# Altium PCB template.PcbDoc
Units mil, origin at the board's own origin, x right, y up, seen from the top; angles counter-clockwise.
Board outline 2450 x 2235 mil, 2 copper layers (Top Layer, Bottom Layer); 20 components, 38 nets, 182 pads, 24 vias.
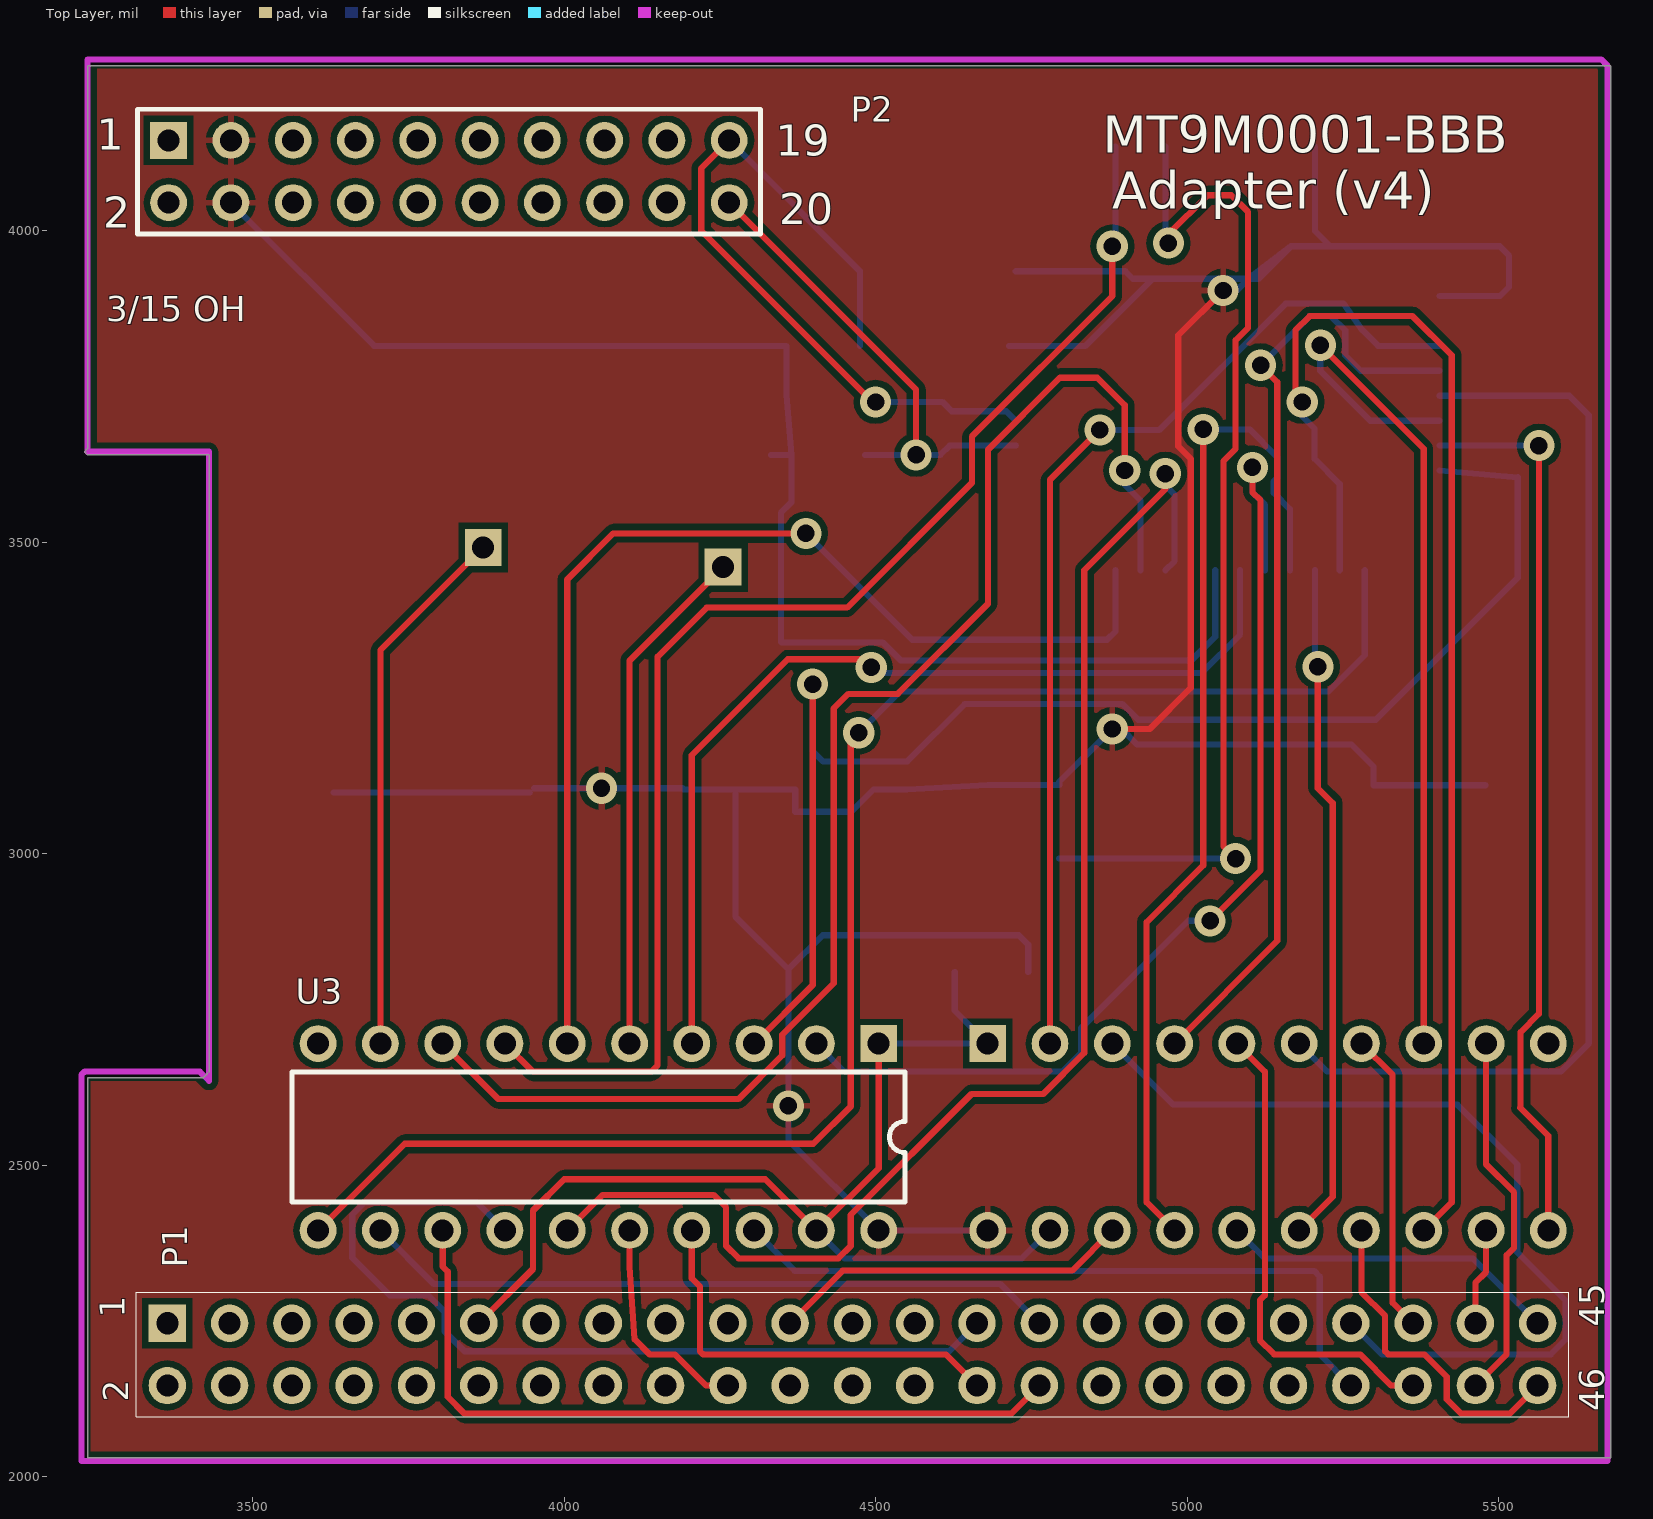
[diagram p0: Top Layer view]
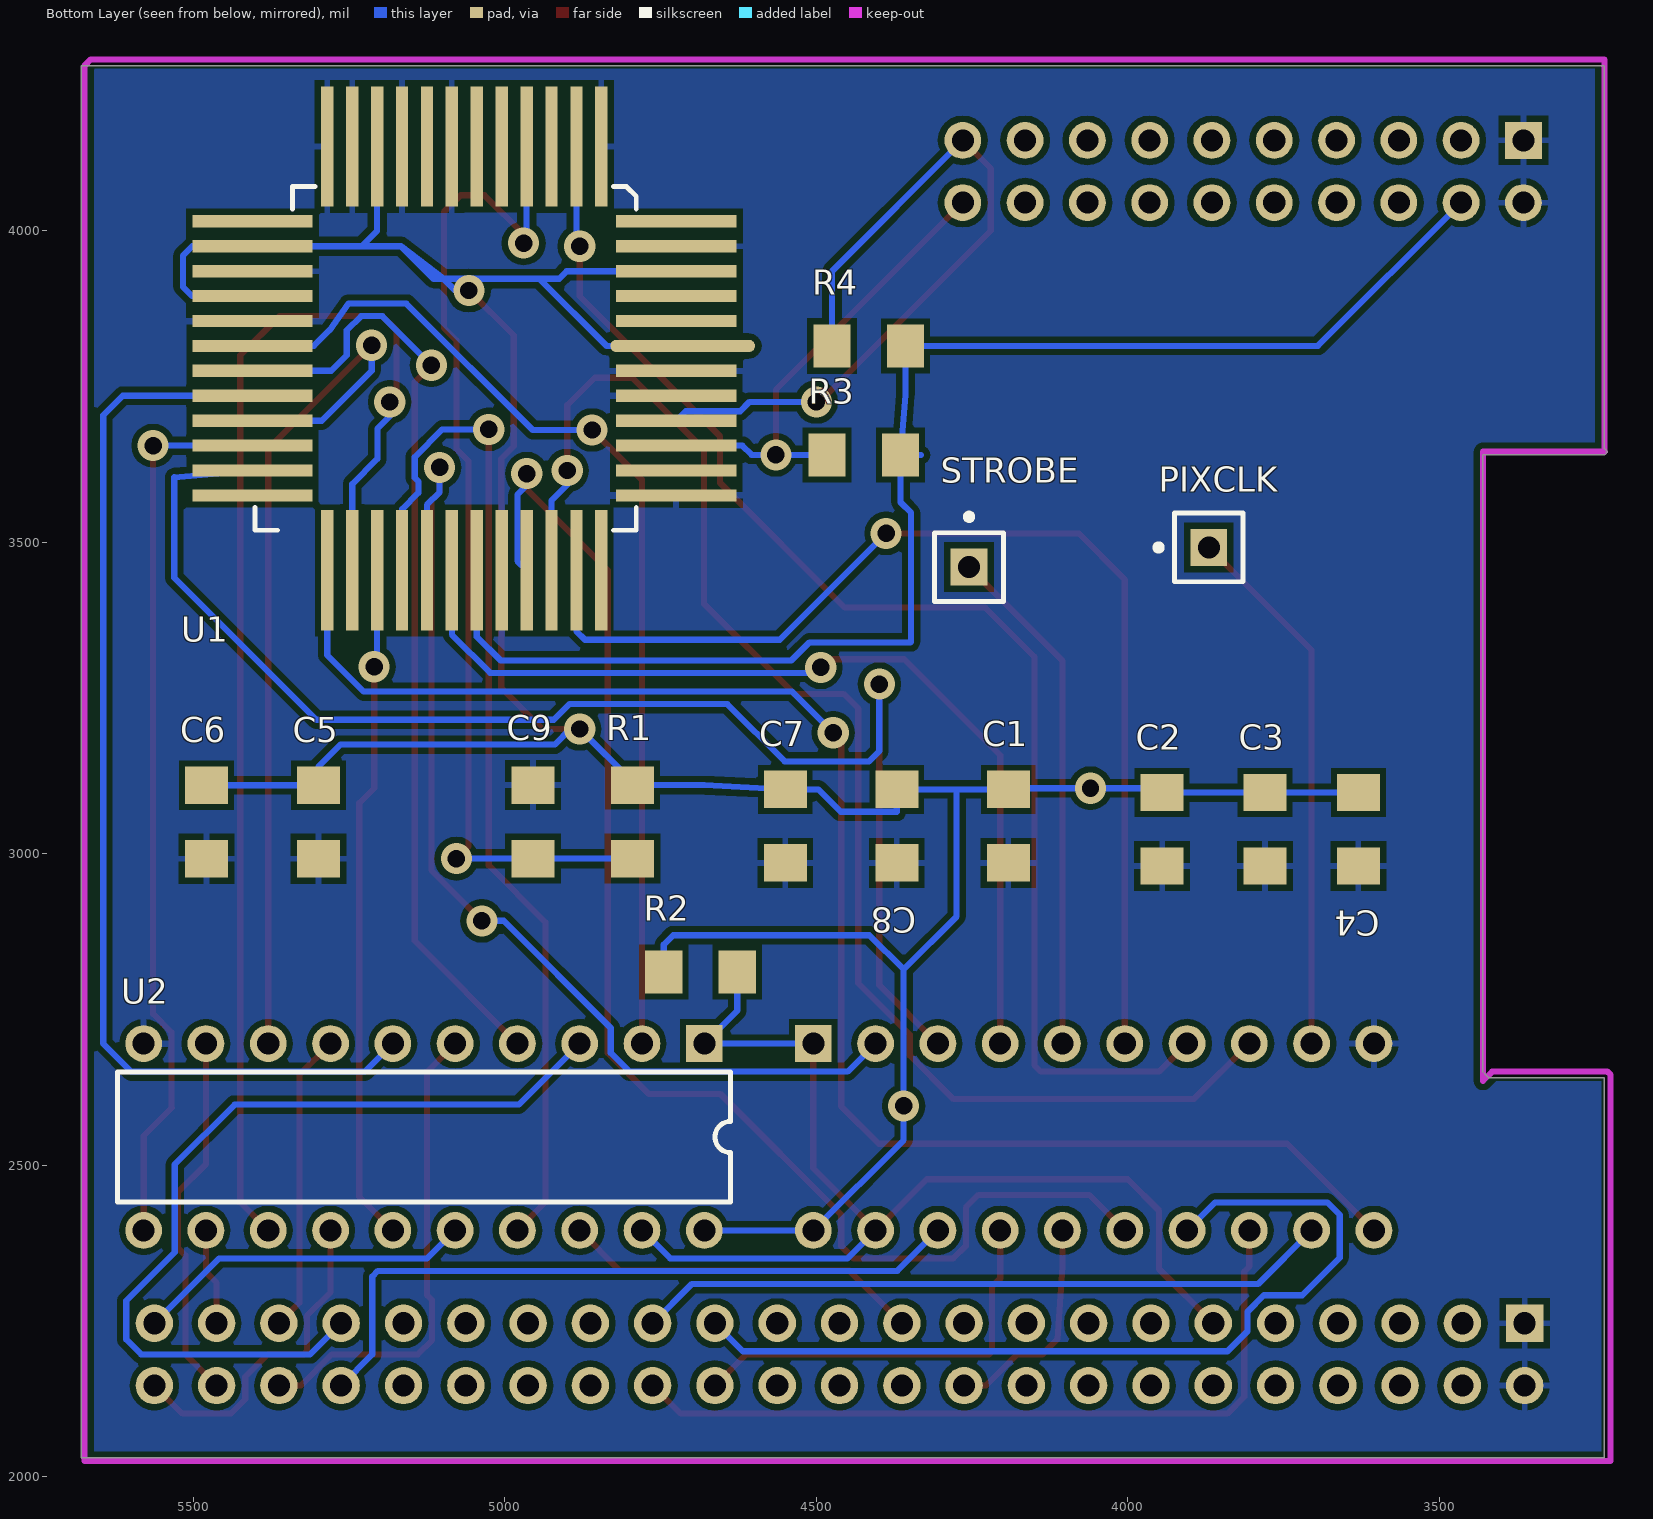
[diagram p1: Bottom Layer view, seen from below]

## Layer stack, top to bottom
Top Solder: solder mask 0.4, Solder Resist, Dk 3.5
Top Layer: signal copper 1.4
Dielectric 1: dielectric 12.6, FR-4, Dk 4.8
Bottom Layer: signal copper 1.4
Bottom Solder: solder mask 0.4, Solder Resist, Dk 3.5

## Board outline
5680,4265 5680,2030 3235,2030 3235,2640 3420,2640 3425,2645 3430,2650 3430,3640 3235,3640 3230,3645 3235,3650 3235,4265 5680,4265

## Design rules (kind name [scope] priority, off if disabled: settings)
Clearance [All] p1: gap=10
MinimumSolderMaskSliver [All] p1: minsoldermaskwidth=5
PolygonConnect [All] p1: connectstyle=Relief reliefconductorwidth=10 reliefentries=4 polygonreliefangle="90 Angle" airgapwidth=10
RoutingVias [All] p1: holewidth=28 width=50 viastyle="Through Hole" minholewidth=28 minwidth=50 maxholewidth=28 maxwidth=50
SolderMaskExpansion [All] p1: expansion=4
UnpouredPolygon [All] p1: allowunpoured=FALSE
Width [All] p1: maxlimit=10 minlimit=10 preferedwidth=10
28 further rules are at their usual default settings.

## Components (designator, comment, footprint, x,y, rotation, side; value= is the part's Value field where it differs from the comment)
C1 "1nF" 1206 4232,2985 r270 bottom
C2 "10nF" 1206 3985,2980 r270 bottom
C3 "100nF" 1206 3820,2980 r270 bottom
C4 "1uF" 1206 3670,2980 r270 bottom
C5 "100nF" 1206 5339.19,2991.81 r270 bottom
C6 "1uF" 1206 5519.19,2991.81 r270 bottom
C7 "100nF" 1206 4590,2985 r270 bottom
C8 "1uF" 1206 4411,2985 r270 bottom
C9 "1uF" 1206 4915,3110 r90 bottom
P1 "FEMALE HEADER 2x23" HEADER23X2 4462.9,2196 r0 top
P2 "Header 10X2" HDR2X10 3365,4145 r0 top
PIXCLK "Socket" PIN1 3870,3491.5 r90 bottom
R1 "10K" 1206 4755,3110 r90 bottom
R2 "10k" 1206 4745,2850 r0 bottom
R3 "10k" 1206 4365,3600 r180 bottom
R4 "10k" 1206 4475,3855 r0 bottom
STROBE "Socket" PIN1 4255,3460 r180 bottom
U1 "MT9M001" MT9M001_SOCKET 5065,3795 r270 bottom
U2 "74LVC244A" J020 5130,2545 r0 bottom
U3 "74LVC244A" J020 4055,2545 r180 top

## Footprints (in the part's own frame and the unit in brackets; to place one, negate y for a bottom-side part, rotate by r counter-clockwise, add the part's x,y. Pads: shape width x height; smd on the part's side, far side on the other; paste and mask are expansions set on the pad)
1206 [mil]
  rect 60x69 smd: 1(-118,40) 2(0,40)
HDR2X10 [mm] "Connector; Header; 10x2 Position"
  rect 1.5x1.5 hole 0.9: 1(0,0)
  round 1.5 hole 0.9: 2(0,-2.54) 3(2.54,0) 4(2.54,-2.54) 5(5.08,0) 6(5.08,-2.54) 7(7.62,0) 8(7.62,-2.54) 9(10.16,0) 10(10.16,-2.54) 11(12.7,0) 12(12.7,-2.54) 13(15.24,0) 14(15.24,-2.54) 15(17.78,0) 16(17.78,-2.54) 17(20.32,0) 18(20.32,-2.54) 19(22.86,0) 20(22.86,-2.54)
  silkscreen extent -1.27,-3.81 24.13,1.27
HEADER23X2 [mil] "HEADER23X2"
  rect 60x60 hole 35.43 mask+2: 1(-1100,50)
  round 60 hole 35.43 mask+2: 2(-1100,-50) 3(-1000,50) 4(-1000,-50) 5(-900,50) 6(-900,-50) 7(-800,50) 8(-800,-50) 9(-700,50) 10(-700,-50) 11(-600,50) 12(-600,-50) 13(-500,50) 14(-500,-50) 15(-400,50) 16(-400,-50) 17(-300,50) 18(-300,-50) 19(-200,50) 20(-200,-50) 21(-100,50) 22(-100,-50) 23(0,50) 24(0,-50) 25(100,50) 26(100,-50) 27(200,50) 28(200,-50) 29(300,50) 30(300,-50) 31(400,50) 32(400,-50) 33(500,50) 34(500,-50) 35(600,50) 36(600,-50) 37(700,50) 38(700,-50) 39(800,50) 40(800,-50) 41(900,50) 42(900,-50) 43(1000,50) 44(1000,-50) 45(1100,50) 46(1100,-50)
  silkscreen extent -1150,-100 1150,100
J020 [mm] "DIP; 20 Leads; Row Spacing 7.62 mm; Pitch 2.54 mm"
  rect 1.5x1.5 hole 0.9: 1(-11.43,-3.81)
  round 1.5 hole 0.9: 2(-8.89,-3.81) 3(-6.35,-3.81) 4(-3.81,-3.81) 5(-1.27,-3.81) 6(1.27,-3.81) 7(3.81,-3.81) 8(6.35,-3.81) 9(8.89,-3.81) 10(11.43,-3.81) 11(11.43,3.81) 12(8.89,3.81) 13(6.35,3.81) 14(3.81,3.81) 15(1.27,3.81) 16(-1.27,3.81) 17(-3.81,3.81) 18(-6.35,3.81) 19(-8.89,3.81) 20(-11.43,3.81)
  silkscreen extent -12.5,-2.65 12.5,2.65
MT9M001_SOCKET [mm]
  oval 0.5x5.9 smd: 1(-0.508,8.898)
  rect 0.5x4.9 smd: 2(-1.524,8.636) 3(-2.54,8.636) 4(-3.556,8.636) 5(-4.572,8.636) 6(-5.588,8.636) 19(-5.588,-8.648) 20(-4.572,-8.648) 21(-3.556,-8.648) 22(-2.54,-8.648) 23(-1.524,-8.648) 24(-0.508,-8.648) 25(0.508,-8.648) 26(1.524,-8.648) 27(2.54,-8.648) 28(3.556,-8.648) 29(4.572,-8.648) 30(5.588,-8.648) 43(5.588,8.636) 44(4.572,8.636) 45(3.556,8.636) 46(2.54,8.636) 47(1.524,8.636) 48(0.508,8.636)
  rect 4.9x0.5 smd: 7(-8.642,5.582) 8(-8.642,4.566) 9(-8.642,3.55) 10(-8.642,2.534) 11(-8.642,1.518) 12(-8.642,0.502) 13(-8.642,-0.514) 14(-8.642,-1.53) 15(-8.642,-2.546) 16(-8.642,-3.562) 17(-8.642,-4.578) 18(-8.642,-5.594) 31(8.642,-5.594) 32(8.642,-4.578) 33(8.642,-3.562) 34(8.642,-2.546) 35(8.642,-1.53) 36(8.642,-0.514) 37(8.642,0.502) 38(8.642,1.518) 39(8.642,2.534) 40(8.642,3.55) 41(8.642,4.566) 42(8.642,5.582)
  silkscreen extent -7.01,-8.54 7.01,7
PIN1 [mm] "Connector; Plug"
  rect 1.5x1.5 hole 0.9: 1(0,0)
  silkscreen extent -1.4,-1.4 1.4,2.18

## Part data
C1 C2 C3 C4 C5 C6 C7 C8 C9: library part cap, "capacitor"
P1: library part HDR_46_F_2_0.1_0.1, "CONN HEADER FMAL 46PS.1\" DL GOLD"
P2: "Header, 10-Pin, Dual row"
R1 R2 R3 R4: library part Res, "resistor"

## Via types
v1: diameter 50, hole 28, Top Layer to Bottom Layer, 24 vias

## Nets (pads, with @x,y where several pads share a name; then routed paths per layer and width w, separated by ;. In a path a pad name is that pad's centre, name@x,y a point inside that pad or via, vN(x,y) a via of type N, cw(c..) or ccw(c..) an arc to the next point about the centre after c; other vN are vias at no path point)
3.3V: C1.1 C2.1 C3.1 C4.1 C5.1 C6.1 C7.1 C8.1 P2.3 P2.4 R1.2 R2.2 R3.2 R4.1 U1.1 U1.4 U1.16 U1.20 U1.22 U1.37 U2.20 U3.20 | length 8159.4
  Top Layer w10: v1(4880,3200) 4940,3200 5006,3266 5006,3634 4986,3654 4986,3832 v1(5058,3904)
  Bottom Layer w10: P2.4 3695,3815 R4.1 4357,3736 R3.2 ; C4.1 C3.1 C2.1 ; C2.1@3952,3105 v1(4060,3105) C1.1@4190,3105 ; C1.1 4275,3103 ; 4332,3640 R3.2 ; U2.20 U3.20 4360,2540 v1(4360,2595) 4360,2814 ; U1.1 4837,3815 4945,3923 ; U1.4 4901,3935 4913,3923 4945,3923 ; R2.2 4745,2854 4730,2869 4415,2869 4360,2814 ; U1.37 5045.24,3348.24 5007,3310 4540.14,3310 4511.12,3339.02 4348.98,3339.02 4348,3340 4348,3547 4365,3564 R3.2 ; v1(5058,3904) 5080,3904 5099,3923 ; U1.16 5205.24,4000 5230.24,3975 ; U1.22 5502,3895 5517,3910 5517,3960 5502,3975 U1.20 5230.24,3975 ; C6.1 C5.1 5299.19,3140 5264.19,3175 4920,3175 4895,3200 v1(4880,3200) 4795,3115 R1.2 4680,3110 C7.1 4497,3103 4461,3067 4371,3067 C8.1 4275,3103 ; 4275,3103 4275,2899 4360,2814 ; 4945,3923 5099,3923 ; 5099,3923 5166.93,3975 ; 5099,3923 5114.93,3923 5166.93,3975 ; 5166.93,3975 5230.24,3975
D0: P1.21 U2.18 | length 578.8
  Top Layer w10: P1.21 4447.37,2330.47 4815.47,2330.47 U2.18
D1: P1.45 U2.16 | length 544.6
  Bottom Layer w10: U2.16 5125,2350 5458.9,2350 P1.45
D2: P1.46 U2.14 | length 535.8
  Top Layer w10: U2.14 5280,2296 5317.9,2258.1 5317.9,2201 5322.9,2196 5381,2196 5417,2160 5417,2124 5440,2101 5517.9,2101 P1.46
D3: P1.43 U2.12 | length 156.1
  Top Layer w10: P1.43 5462.9,2311 5480,2328.1 U2.12
D4: P1.44 U2.9 | length 593.4
  Top Layer w10: P1.44 5513,2196.1 5513,2355 5525,2367 5525,2456 5480,2501 U2.9
D5: P1.41 U2.7 | length 483.3
  Top Layer w10: U2.7 5330,2645 5330,2278.9 P1.41
D6: P1.42 U2.5 | length 774.1
  Top Layer w10: U2.5 5125,2650 5125,2291 5117,2283 5117,2219 5140,2196 5277.9,2196 5327.9,2146 P1.42
D7: P1.39 U2.3 | length 1419.4
  Bottom Layer w10: U2.3 4978,2597 5434,2597 5530,2501 5530,2360 5608,2282 5608,2220 5584,2196 5312.9,2196 P1.39
D8: P1.40 U3.18 | length 1134.3
  Bottom Layer w10: U3.18 4370,2330 5204,2330 5213,2321 5213,2195.9 P1.40
D9: P1.20 U3.16 | length 355.8
  Top Layer w10: U3.16 4105,2337 4113,2220 4137,2196 4177.9,2196 4227.9,2146 P1.20
EXPOSURE: P1.30 U3.13 | length 1250
  Top Layer w10: U3.13 3805,2337 3813,2329 3813,2128 3840,2101 4717.9,2101 P1.30
FRAME_VALID: P1.27 U3.14 | length 1443.1
  Bottom Layer w10: U3.14 3860,2440 3680,2440 3660,2420 3660,2351 3720,2291 3781.54,2291 3807.9,2264.64 3807.9,2233.1 3840,2201 4617.9,2201 P1.27
GND: C1.2 C2.2 C3.2 C4.2 C5.2 C6.2 C7.2 C8.2 C9.2 P1.1 P1.2 P2.1 P2.2 U1.5 U1.7 U1.13 U1.15 U1.17 U1.18 U1.21 U1.23 U1.38 U1.43 U1.47 U1.48 U2.10 U3.10
LINE_VALID: P1.29 U3.12 | length 1119.6
  Bottom Layer w10: U3.12 3791,2309 4699.9,2309 P1.29
NetC9_1: C9.1 R1.1 U1.10 | length 1681.7
  Top Layer w10: v1(4970,3980) 4970,3994 5033,4057 5071,4057 5098,4030 5098,3844 5078,3824 5078,3649.57 5058.75,3630.32 5058.75,3011.25 v1(5078,2992)
  Bottom Layer w10: R1.1 C9.1 v1(5078,2992) ; U1.10 4965.24,3984.76 v1(4970,3980)
NetU1_8: U1.8 U3.7 | length 2179.7
  Top Layer w10: U3.7 3950,2650 4140,2650 4150,2660 4150,3316.26 4228.74,3395 4454.29,3395 4654.78,3595.49 4654.78,3669.76 4880,3894.98 v1(4880,3975)
  Bottom Layer w10: v1(4880,3975) 4885.24,3980.24 U1.8
NetU1_24: U1.24 U2.2 | length 1680.1
  Top Layer w10: U2.2 4780,3600.02 v1(4860,3680.02)
  Bottom Layer w10: v1(4860,3680.02) 4955.33,3680.02 5158.31,3883 5251,3883 5281.96,3840 5306.96,3815 U1.24
NetU1_25: U1.25 U2.4 | length 1548.6
  Top Layer w10: U2.4 5145,2860 5145,3757 v1(5118,3784)
  Bottom Layer w10: v1(5118,3784) 5197,3863 5231,3863 5254,3840 5254,3800 5279,3775 U1.25
NetU1_26: U1.26 U2.6 | length 1763.5
  Bottom Layer w10: U2.6 5225,2650 5600,2650 5645,2695 5645,3703.78 5613.78,3735 U1.26
NetU1_27: U1.27 U2.8 | length 1455.4
  Top Layer w10: v1(5214,3816) 5380,3650 U2.8
  Bottom Layer w10: v1(5214,3816) 5214,3775 5294,3695 U1.27
NetU1_28: U1.28 U2.11 | length 1450.6
  Top Layer w10: v1(5565,3655) 5565,2742.97 5535.47,2713.44 5535.47,2592.47 5535,2592 5580,2547 U2.11
  Bottom Layer w10: U1.28 v1(5565,3655)
NetU1_29: U1.29 U3.3 | length 2292.2
  Top Layer w10: U3.3 4399,2789 v1(4399,3272)
  Bottom Layer w10: v1(4399,3272) 4399,3164.5 4415.5,3148 4551,3148 4643,3240 4896.57,3240 4921.57,3215 5303,3215 5531,3443 5531,3604 U1.29
NetU1_31: U1.31 U3.11 | length 2542.8
  Top Layer w10: U3.11 3744,2534 4400,2534 4460,2594 4460,3181 v1(4473,3194)
  Bottom Layer w10: v1(4473,3194) 4539,3260 5226.57,3260 5285.24,3318.67 U1.31
NetU1_32: U1.32 U2.13 | length 2125
  Top Layer w10: v1(5185,3725) 5174,3736 5174,3840 5197,3863 5362,3863 5425,3800 5425,2440 U2.13
  Bottom Layer w10: v1(5185,3725) 5185,3702.13 5204.85,3682.28 5204.85,3633.59 5245.24,3593.2 U1.32
NetU1_33: U1.33 U2.15 | length 1094
  Top Layer w10: U2.15 5234,2449 5234,3081 5210,3105 v1(5210,3300)
  Bottom Layer w10: U1.33 5205.24,3304.76 v1(5210,3300)
NetU1_34: U1.34 U2.17 | length 1674.9
  Top Layer w10: U2.17 4935,2440 4935,2889.95 5026,2980.95 v1(5026,3681)
  Bottom Layer w10: v1(5026,3681) 5100.57,3681 5145,3636.57 5145,3603.43 5139,3597.43 5139,3579 5165.24,3552.76 U1.34
NetU1_35: U1.35 U3.2 | length 1714.9
  Top Layer w10: v1(5037,2892) 5118,2973 5118,3567 5105,3580 v1(5105,3620)
  Bottom Layer w10: U3.2 4450,2650 4800,2650 4830,2680 4830,2720 5002,2892 v1(5037,2892) ; v1(5105,3620) 5105,3580 5125.24,3559.76 U1.35
NetU1_36: U1.36 U3.4 | length 1544.8
  Top Layer w10: U3.4 4205,3158 4359,3312 4480,3312 v1(4493,3299)
  Bottom Layer w10: v1(4493,3299) 4502,3290 5023.65,3290 5085.24,3351.59 U1.36
NetU1_39: U1.39 U3.15 | length 2249.8
  Top Layer w10: U3.15 4062,2452 4240,2452 4260,2432 4260,2370 4280,2350 4440,2350 4460,2370 4460,2420 4654,2614 4769,2614 4835,2680 4835,3455 4965.24,3585.24 4965.24,3609.76 v1(4965,3610)
  Bottom Layer w10: v1(4965,3610) 4965,3591.22 4980.08,3576.14 4980.08,3469.61 U1.39
NetU1_40: U1.40 U3.8 | length 2328.1
  Top Layer w10: U3.8 3894,2606 4280,2606 4350,2676 4350,2709 4433,2792 4433,3232.97 4456.31,3256.28 4535.88,3256.28 4680.43,3400.84 4680.43,3648.43 4796,3764 4856,3764 4900,3720 v1(4900,3615)
  Bottom Layer w10: v1(4900,3615) 4900,3592.24 4925.24,3567 U1.40
NetU1_41: U1.41 U3.6 | length 1830
  Top Layer w10: U3.6 4005,3440 4079,3514 v1(4388,3514)
  Bottom Layer w10: v1(4388,3514) 4558.69,3343.31 4871.54,3343.31 4885.24,3357 U1.41
OE: P1.11 R2.1 U2.1 U2.19 U3.1 U3.19 | length 1792.4
  Top Layer w10: P1.11 3950,2333.1 3950,2427 4000,2477 4323,2477 U3.19 4505,2495 U3.1
  Bottom Layer w10: U3.19 4450,2350 4735,2350 U2.19 ; U3.1 U2.1 4627,2748 R2.1
PIXCLK: PIXCLK.1 U3.9 | length 864.8
  Top Layer w10: U3.9 3705,3326.5 PIXCLK.1
SCLK: P2.19 R4.2 U1.46 | length 1219
  Top Layer w10: P2.19 4220,4100 4220,4000 4500,3720 v1(4500,3725)
  Bottom Layer w10: P2.19 4475,3935 R4.2 ; v1(4500,3725) 4607.49,3725 4622.33,3710.16 4709.84,3710.16 U1.46
SDATA: P2.20 R3.1 U1.45 | length 777.5
  Top Layer w10: P2.20 4565,3745 v1(4565,3640)
  Bottom Layer w10: R3.1 v1(4565,3640) 4604,3640 4619,3655 U1.45
STROBE: STROBE.1 U3.5 | length 827.1
  Top Layer w10: U3.5 4105,3310 STROBE.1
SYSCLK: P1.28 U3.17 | length 667.1
  Top Layer w10: U3.17 4205,2318 4217.9,2305.1 4217.9,2201 4222.9,2196 4612.9,2196 P1.28
pads on no net: P1.3 P1.4 P1.5 P1.6 P1.7 P1.8 P1.9 P1.10 P1.12 P1.13 P1.14 P1.15 P1.16 P1.17 P1.18 P1.19 P1.22 P1.23 P1.24 P1.25 P1.26 P1.31 P1.32 P1.33 P1.34 P1.35 P1.36 P1.37 P1.38 P2.5 P2.6 P2.7 P2.8 P2.9 P2.10 P2.11 P2.12 P2.13 P2.14 P2.15 P2.16 P2.17 P2.18 U1.2 U1.3 U1.6 U1.9 U1.11 U1.12 U1.14 U1.19 U1.30 U1.42 U1.44

## Polygon pours and split planes (outlines as drawn)
3.3V on Top Layer "top fill" (solid, pour order 4): 3235,4265 3235,3635 3240,3640 3430,3640 3430,2650 3420,2640 3235,2640 3235,2030 5680,2030 5680,4265 3235,4265
GND on Bottom Layer "top fill" (solid, pour order 6): 5680,4265 5680,2030 3235,2030 3235,2640 3242.5,2647.5 3427.5,2647.5 3427.5,3637.5 3430,3640 3420,3650 3235,3650 3235,4265 3245,4275 5675,4275

## Keep-outs
Keep-Out Layer:
  lines w10: 3225,2025 5675,2025 5675,4265 5665,4275 3235,4275 3235,3645 3430,3645 3430,2635 3415,2650 3230,2650 3225,2645 3225,2025

## Other copper
Top Layer:
  rectangle: 3232.5,3640 3430,3642.5

## Silkscreen, mask and mechanical layers (free items; w line width, h text height)
Top Overlay:
  text "MT9M0001-BBB" at 4865,4125 h60
  text "Adapter (v4)" at 4880,4035 h60
  text "3/15 OH" at 3265,3855 h40
  text "1" at 3295,2255 h40 r90
  text "45" at 5670,2240 h40 r90
  text "2" at 3300,2120 h40 r90
  text "46" at 5670,2105 h40 r90

## Text inside footprints (layer, text, board x,y; h text height)
P2: Top Overlay "20" at 4345,4010 h50; Top Overlay "19" at 4340,4120 h50; Top Overlay "1" at 3250,4130 h50; Top Overlay "2" at 3260,4005 h50